# Altium PCB 扩展板.PcbDoc
Units mm, origin at the board's own origin, x right, y up, seen from the top; angles counter-clockwise.
Board outline 49.96 x 37.29 mm, 2 copper layers (Top Layer, Bottom Layer); 32 components, 23 nets, 129 pads, 60 vias.
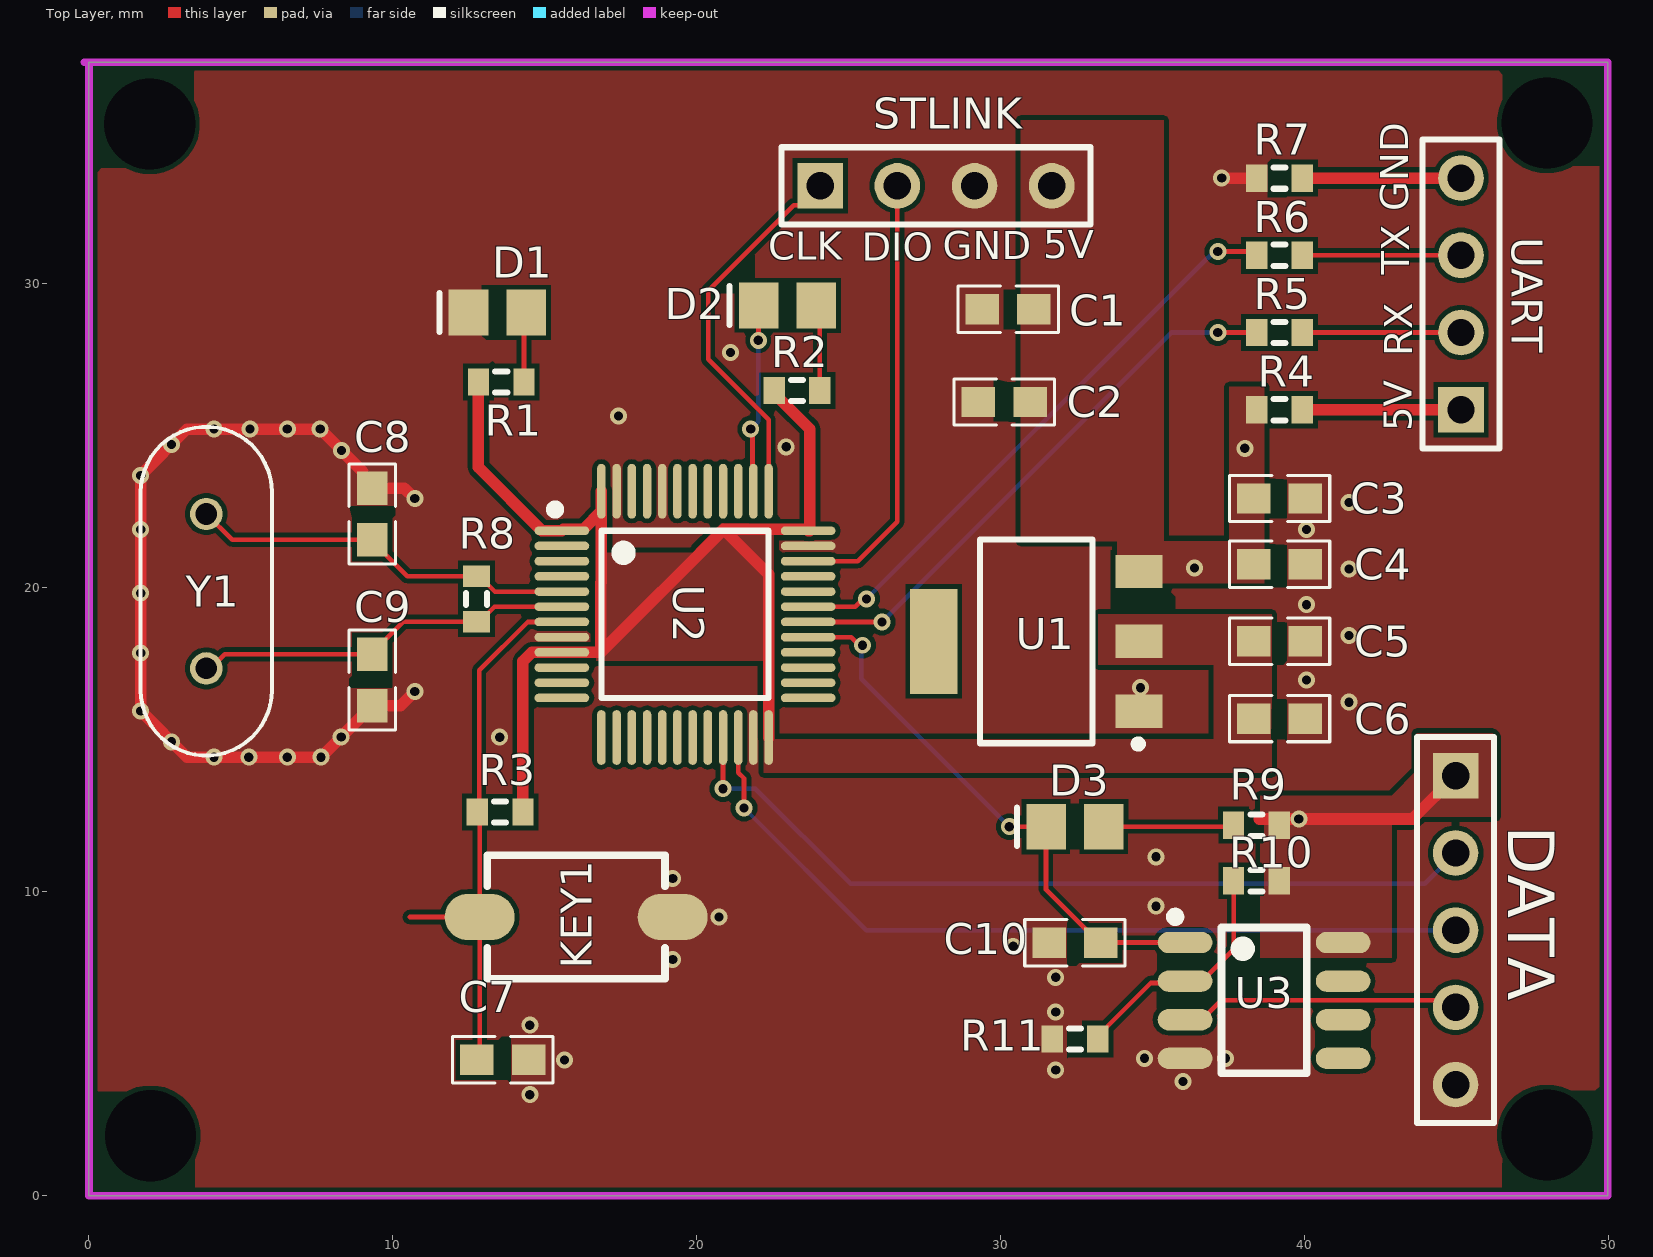
[diagram p0: Top Layer view]
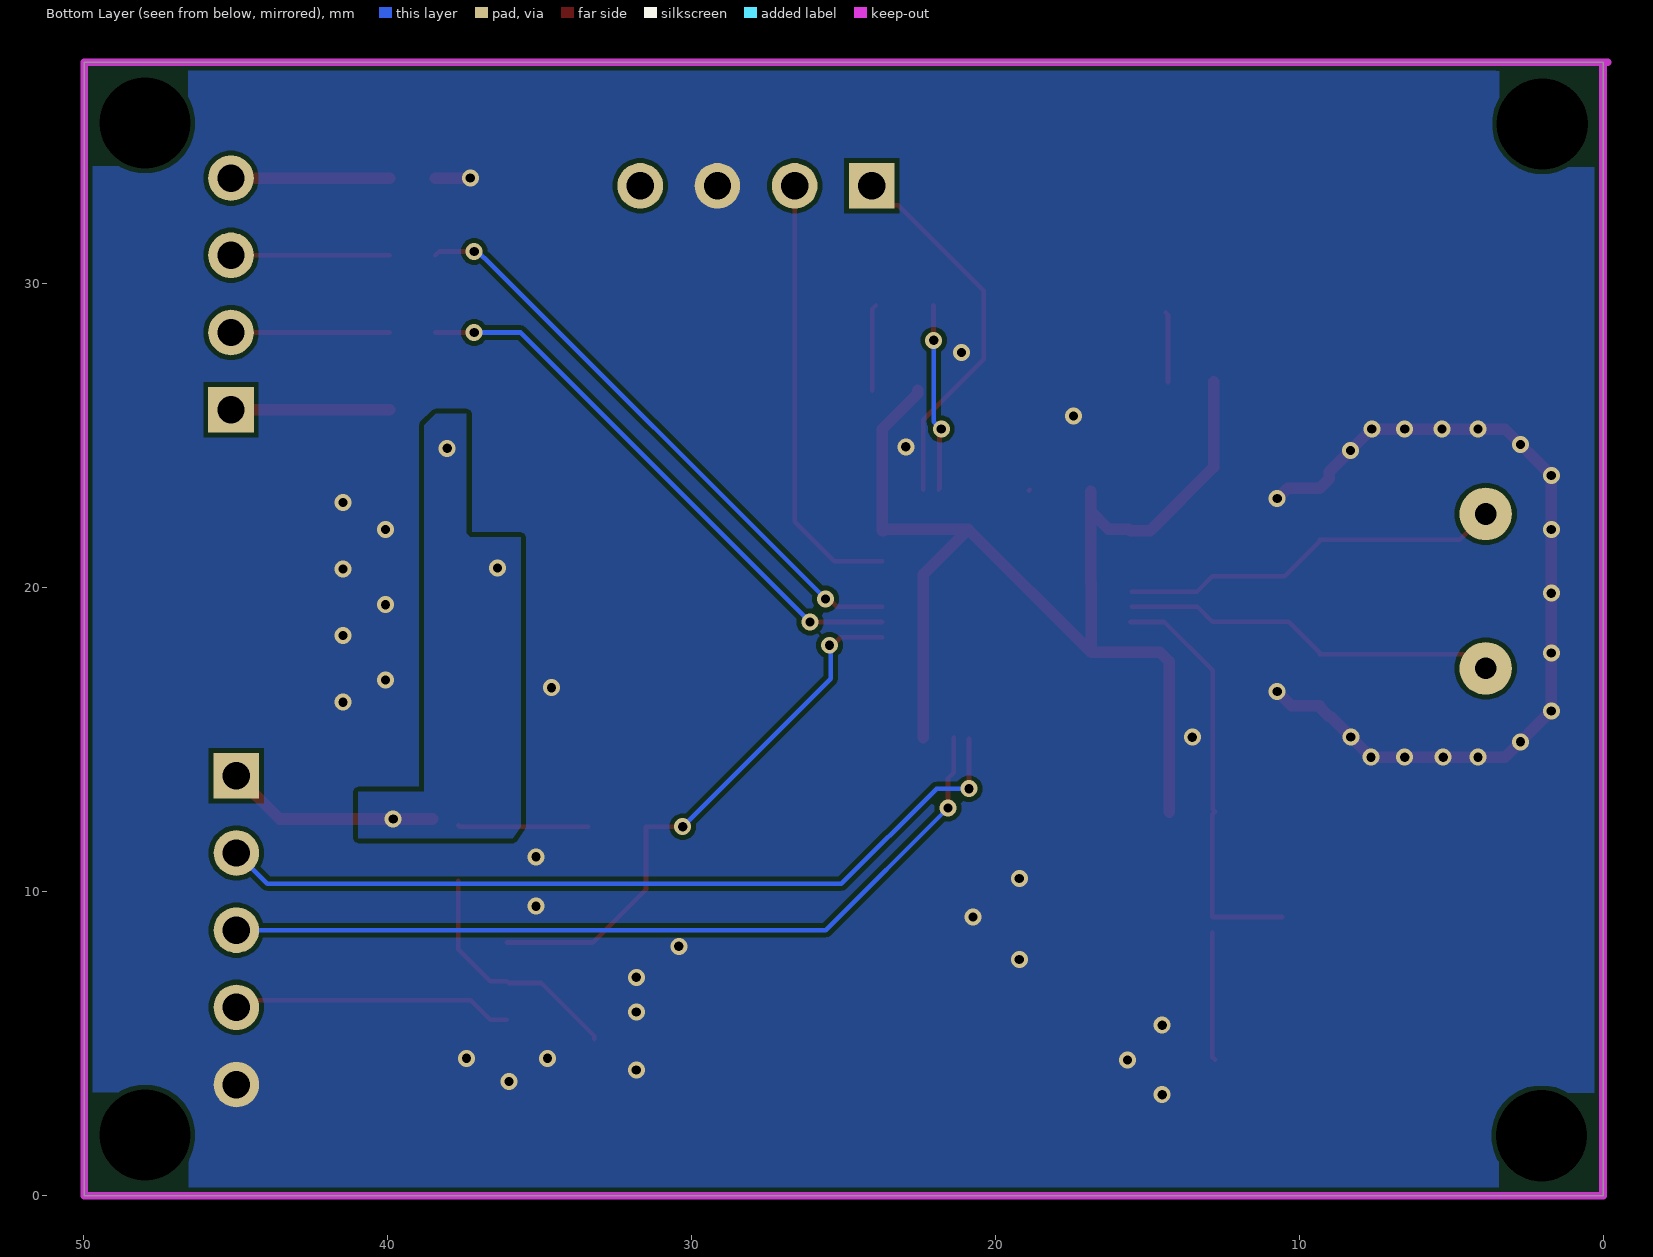
[diagram p1: Bottom Layer view, seen from below]

## Layer stack, top to bottom
Top Solder: solder mask 0.0102, Solder Resist, Dk 3.5
Top Layer: signal copper 0.0356
Dielectric 1: dielectric 0.32, FR-4, Dk 4.8
Bottom Layer: signal copper 0.0356
Bottom Solder: solder mask 0.0102, Solder Resist, Dk 3.5

## Board outline
0,0 0,37.287 49.962,37.287 49.962,0

## Design rules (kind name [scope] priority, off if disabled: settings)
Clearance [All] p1: gap=0.152 ignorepadtopadclearanceinfootprint=FALSE
PlaneClearance [All] p1: clearance=0.203
PolygonConnect PWRPlane [InNetClass('PWR')] p1: connectstyle=Direct reliefconductorwidth=0.254 reliefentries=4 polygonreliefangle="90 Angle" airgapwidth=0.254
PolygonConnect [All] p2: thpad.connectstyle=Relief thpad.reliefconductorwidth=0.254 thpad.reliefentries=4 thpad.polygonreliefangle="90 Angle" thpad.airgapwidth=0.254 smdpad.connectstyle=Relief smdpad.reliefconductorwidth=0.254 smdpad.reliefentries=4 smdpad.polygonreliefangle="90 Angle" smdpad.airgapwidth=0.254 via.connectstyle=Direct via.reliefconductorwidth=0.254 via.reliefentries=4 via.polygonreliefangle="90 Angle" via.airgapwidth=0.254
RoutingVias [All] p1: holewidth=0.305 width=0.559 viastyle="Through Hole" minholewidth=0.305 minwidth=0.559 maxholewidth=0.305 maxwidth=0.559
SilkToSilkClearance [All] p1: silktosilkclearance=0.051
SilkToSolderMaskClearance [IsPad] p1: minsilkscreentomaskgap=0.051 clearancetoexposedcopper=TRUE
SolderMaskExpansion [All] p1: expansion=0.102 istentingtop=FALSE
Width PWR [InNetClass('PWR')] p1: maxlimit=0.762 minlimit=0.305 preferedwidth=0.381
Width [All] p2: maxlimit=0.152 minlimit=0.152 preferedwidth=0.152
27 further rules are at their usual default settings.

## Classes and differential pairs
net class PWR: +5V GND NetP2_1 NetP2_4 VCC3V3
component class 扩展板: C9 C10 D1 D2 D3 KEY1 R1 R2 R3 R4 R5 R6 R7 R8 R9 R10 R11 STLINK U1 U2 U3 UART Y1

## Components (designator, comment, footprint, x,y, rotation, side; value= is the part's Value field where it differs from the comment)
C1 "106" C0603(1608) 30.238,29.159 r0 top
C2 "104" C0603(1608) 30.111,26.111 r0 top
C3 "106" C0603(1608) 39.167,22.936 r180 top
C4 "104" C0603(1608) 39.167,20.777 r180 top
C5 "106" C0603(1608) 39.167,18.237 r180 top
C6 "104" C0603(1608) 39.167,15.697 r180 top
C7 "104" C0603(1608) 13.614,4.47 r180 top
C8 "20p" C0603(1608) 9.322,22.428 r270 top
C9 "20p" C0603(1608) 9.322,16.967 r90 top
C10 "104" C0603(1608) 32.436,8.322 r180 top
D1 "LED0603" LED_0805 13.437,29.058 r180 top
D2 "LED0603" LED_0805 22.977,29.286 r180 top
D3 "LED0603" LED_0805 32.436,12.141 r180 top
DATA "Header 5" HDR1X5 44.958,13.818 r270 top (schematic designator P3)
KEY1 "KEY_M" 贴片按键 16.027,9.169 r180 top
R1 "1K" J1-0603 13.564,26.772 r180 top value=10K
R2 "1K" J1-0603 23.292,26.492 r180 top value=10K
R3 "10K" J1-0603 13.526,12.624 r0 top
R4 "0" J1-0603 39.167,25.857 r180 top value=10K
R5 "0" J1-0603 39.167,28.397 r180 top value=10K
R6 "0" J1-0603 39.167,30.937 r180 top value=10K
R7 "0" J1-0603 39.167,33.477 r180 top value=10K
R8 "1M" J1-0603 12.751,19.634 r90 top value=10K
R9 "10K" J1-0603 38.405,12.187 r0 top
R10 "1K" J1-0603 38.405,10.363 r0 top value=10K
R11 "1K" J1-0603 32.436,5.156 r0 top value=10K
STLINK "ST-LINK" HDR1X4 24.054,33.223 r0 top (schematic designator P1)
U1 "1117-3.3V" SOT-223 31.166,18.237 r90 top
U2 "STM32F103C" LQFP-48_7x7x05P 19.609,19.126 r270 top
U3 "lm393" SOP-8_150mil 38.659,6.426 r270 top
UART "USART" HDR1X4 45.136,25.857 r90 top (schematic designator P2)
Y1 "8M" XTAL-HC49US2 3.861,22.428 r270 top

## Footprints (in the part's own frame and the unit in brackets; to place one, negate y for a bottom-side part, rotate by r counter-clockwise, add the part's x,y. Pads: shape width x height; smd on the part's side, far side on the other; paste and mask are expansions set on the pad)
C0603(1608) [mm] "贴片0603"
  rect 1.1x1 smd: 1(-0.85,0) 2(0.85,0)
  silkscreen extent -1.65,-0.76 1.65,0.76, body extent -1.14,-0.38 1.14,0.38, height 1
HDR1X4 [mm] "Connector; Header; 4 Position"
  rect 1.5x1.5 hole 0.9: 1(0,0)
  round 1.5 hole 0.9: 2(2.54,0) 3(5.08,0) 4(7.62,0)
  silkscreen extent -1.27,-1.27 8.89,1.27
HDR1X5 [mm] "Connector; Header; 5 Position"
  rect 1.5x1.5 hole 0.9: 1(0,0)
  round 1.5 hole 0.9: 2(2.54,0) 3(5.08,0) 4(7.62,0) 5(10.16,0)
  silkscreen extent -1.27,-1.27 11.43,1.27
J1-0603 [mm] "Chip Resistor, Body 1.6x0.8mm, IPC High Density"
  rect 0.7x0.9 smd: 1(-0.75,0) 2(0.75,0)
  silkscreen extent -0.2,-0.35 0.2,0.35, body extent -0.85,-0.48 0.85,0.48, height 0.9
LED_0805 [mm] "贴片二极管"
  rect 1.3x1.5 smd: 1(-0.95,0) 2(0.95,0)
  silkscreen extent 1.91,-0.63 1.91,0.64
LQFP-48_7x7x05P [mm] "Thin QFP, 48-Leads, Body 7x7mm, Pitch 0.5mm, IPC Low Density"
  oval 0.28x1.8 smd mask+0.051: 1(-2.75,-4.05) 2(-2.25,-4.05) 3(-1.75,-4.05) 4(-1.25,-4.05) 5(-0.75,-4.05) 6(-0.25,-4.05) 7(0.25,-4.05) 8(0.75,-4.05) 9(1.25,-4.05) 10(1.75,-4.05) 11(2.25,-4.05) 12(2.75,-4.05) 25(2.75,4.05) 26(2.25,4.05) 27(1.75,4.05) 28(1.25,4.05) 29(0.75,4.05) 30(0.25,4.05) 31(-0.25,4.05) 32(-0.75,4.05) 33(-1.25,4.05) 34(-1.75,4.05) 35(-2.25,4.05) 36(-2.75,4.05)
  oval 1.8x0.28 smd mask+0.051: 13(4.05,-2.75) 14(4.05,-2.25) 15(4.05,-1.75) 16(4.05,-1.25) 17(4.05,-0.75) 18(4.05,-0.25) 19(4.05,0.25) 20(4.05,0.75) 21(4.05,1.25) 22(4.05,1.75) 23(4.05,2.25) 24(4.05,2.75) 37(-4.05,2.75) 38(-4.05,2.25) 39(-4.05,1.75) 40(-4.05,1.25) 41(-4.05,0.75) 42(-4.05,0.25) 43(-4.05,-0.25) 44(-4.05,-0.75) 45(-4.05,-1.25) 46(-4.05,-1.75) 47(-4.05,-2.25) 48(-4.05,-2.75)
  silkscreen extent -3.6,-4.42 2.75,2.75
SOP-8_150mil [mm]
  oval 0.7x1.8 smd: 1(-1.905,-2.6) 2(-0.635,-2.6) 3(0.635,-2.6) 4(1.905,-2.6) 5(1.905,2.6) 6(0.635,2.6) 7(-0.635,2.6) 8(-1.905,2.6)
  silkscreen extent -2.9,-3.07 2.4,1.4, body extent -2.5,-3.1 2.5,3.1, height 1.75
SOT-223 [mm]
  rect 1.1x1.55 smd: 1(-2.3,-3.375) 2(0,-3.375) 3(2.3,-3.375)
  rect 3.45x1.55 smd: 4(0,3.375)
  silkscreen extent -3.5,-3.48 3.35,1.85, body extent -3.3,-3.94 3.3,3.43, height 0.8
XTAL-HC49US2 [mil]
  round 42 / inner round 68 / far side round 68 hole 28: 1(0,0) 2(200,0)
  silkscreen extent -113,-85 313,85
贴片按键 [mm]
  oval 2.3x1.524 smd: 1(-3.175,0) 2(3.175,0)
  silkscreen extent -2.92,-2.03 2.92,2.03

## Part data
C1 C2 C3 C4 C5 C6 C7 C8 C9 C10: library part C_无极性_0603
D1 D2 D3: "发光二极管", LatestRevisionDate=08-Jul-2005, LatestRevisionNote="Mech Layer 1 removed.", PackageReference=LED-0, Published=8-Jun-2000, Publisher="Altium Limited"
DATA: "Header, 5-Pin", LatestRevisionDate=17-Jul-2002, LatestRevisionNote="Re-released for DXP Platform.", Publisher="Altium Limited"
R1 R2 R3 R4 R5 R6 R7 R8 R9 R10 R11: library part Res3, "Resistor", LatestRevisionDate=29-May-2009, LatestRevisionNote="IPC-7351 Footprint Added.", PackageDescription="Chip Resistor", PackageReference=J1-0603, Published=8-Jun-2000, Publisher="Altium Limited"
STLINK UART: library part "Header 4", "Header, 4-Pin", LatestRevisionDate=17-Jul-2002, LatestRevisionNote="Re-released for DXP Platform.", Publisher="Altium Limited"
U1: "xA 3.3V", ComponentLink1Description="Manufacturer Link", ComponentLink1URL=http://www.national.com/, ComponentLink2Description=Datasheet, ComponentLink2URL=http://www.national.com/ds.cgi/LM/LM2940.pdf, ComponentLink3Description="URL Link1", ComponentLink3URL=http://www.national.com/pf/LM/LM2940C.html, DatasheetVersion=Jun-1999, Note="Tab is connected to GND", PackageDescription="TO, Thru-Hole, Vertical, Heatsink Mounted; 3 In-Line Leads; Pitch 2.54 mm", PackageReference=T03B, PackageVersion=1995, Published=15-Apr-2002, Publisher="Altium Limited"
U2: "STM32单片机48引脚"
Y1: library part XTAL, "Crystal Oscillator", LatestRevisionDate=17-Jul-2002, LatestRevisionNote="Re-released for DXP Platform.", PackageDescription="Crystal, Thru-Hole; 2 Leads; Body 3.1 x 8.2 mm (Dia.xH)", PackageReference=R38, Published=8-Jun-2000, Publisher="Altium Limited"

## Free pads (board coordinates)
  round 1.524 hole 3: 1(2,35.262) 1(2.025,1.975) 1(47.962,35.287) 1(47.962,2)

## Via types
v1: diameter 0.559, hole 0.305, Top Layer to Bottom Layer, tented both sides, 60 vias

## Nets (pads, with @x,y where several pads share a name; then routed paths per layer and width w, separated by ;. In a path a pad name is that pad's centre, name@x,y a point inside that pad or via, vN(x,y) a via of type N, cw(c..) or ccw(c..) an arc to the next point about the centre after c; other vN are vias at no path point)
3144E3: C10.1 D3.2 U2.29 U3.1 | length 18.4
  Top Layer w0.152: U2.29@23.709,18.376 25.075,18.376 25.341,18.11 v1(25.451,18.11) ; v1(30.277,12.141) D3.2 31.486,10.072 33.236,8.322 C10.1 33.295,8.331 U3.1
  Bottom Layer w0.152: v1(25.451,18.11) 25.403,18.062 25.403,17.015 v1(30.277,12.141)
+5V: C1.2 C2.2 C3.2 C4.2 DATA.1 R4.2 R9.2 R10.2 STLINK.4 U1.3 U3.8 | length 7
  Top Layer w0.381: 38.506,12.395 43.536,12.395 DATA.1
  other v1: 39.802,12.395 36.373,20.65 38.024,24.587
GND: C1.1 C2.1 C3.1 C4.1 C5.1 C6.1 C7.1 C8.1 C9.1 C10.2 D1.2 DATA.5 KEY1.1 R7.2 R11.1 STLINK.3 U1.1 U2.8 U2.23 U2.35 U2.44 U2.47 U3.4 | length 30.2
  Top Layer w0.152: U2.44@18.859,23.226 U2.44@18.883,23.202
  Top Layer w0.381: v1(10.719,16.586) 10.25,16.117 C9.1 9.322,16.067 9.012,15.758 8.962,15.758 v1(7.632,14.427) 3.226,14.427 v1(1.702,15.951) v1(1.702,23.698) 3.226,25.222 v1(4.115,25.222) v1(7.606,25.222) 9.012,23.816 9.012,23.588 C8.1 10.377,23.278 v1(10.719,22.936) ; v1(37.262,33.477) R7.2
  other v1: 14.503,3.327 35.992,3.759 31.801,4.14 15.646,4.47 34.722,4.521 37.389,4.521 14.503,5.613 31.801,6.045 31.801,7.188 19.202,7.772 30.404,8.204 20.726,9.169 35.103,9.525 19.202,10.439 35.103,11.151 4.115,14.427 5.258,14.427 6.528,14.427 2.718,14.935 8.297,15.092 13.513,15.088 41.453,16.237 34.595,16.713 40.056,16.967 1.702,17.856 41.453,18.428 40.056,19.444 1.702,19.825 41.453,20.618 1.702,21.92 40.056,21.92 41.453,22.809 8.309,24.519 22.936,24.638 2.718,24.714 5.302,25.222 6.528,25.222 17.424,25.654 21.107,27.737
LED: D2.2 U2.38 | length 6.2
  Top Layer w0.152: v1(21.768,25.222) 21.831,25.159 21.831,23.254 U2.38@21.859,23.226 ; v1(22.022,28.143) 22.027,28.148 D2.2
  Bottom Layer w0.152: v1(21.768,25.222) 21.785,25.222 22.022,25.459 v1(22.022,28.143)
NetC8_2: C8.2 R8.2 U2.5 Y1.1 | length 12.7
  Top Layer w0.152: Y1.1 4.711,21.578 C8.2 9.322,21.528 10.466,20.384 R8.2 12.851,20.384 13.359,19.876 U2.5@15.509,19.876
NetC9_2: C9.2 R8.1 U2.6 Y1.2 | length 12.5
  Top Layer w0.152: Y1.2 4,17.348 4.469,17.817 C9.2 9.322,17.867 10.339,18.884 R8.1 12.851,18.884 13.343,19.376 U2.6@15.509,19.376
NetD1_1: D1.1 R1.1 | length 2.3
  Top Layer w0.152: R1.1 14.314,28.985 D1.1
NetD2_1: D2.1 R2.1 | length 2.8
  Top Layer w0.152: D2.1 24.042,29.171 R2.1
NetD3_1: D3.1 R9.1 | length 4.3
  Top Layer w0.152: D3.1 37.609,12.141 R9.1
NetP2_1: R4.1 UART.1 | length 5.2
  Top Layer w0.381: R4.1 UART.1
NetP2_2: R5.1 UART.2 | length 5.2
  Top Layer w0.152: R5.1 UART.2
NetP2_3: R6.1 UART.3 | length 5.2
  Top Layer w0.152: R6.1 UART.3
NetP2_4: R7.1 UART.4 | length 5.2
  Top Layer w0.381: R7.1 UART.4
NetR10_1: R10.1 R11.2 U3.2 | length 8
  Top Layer w0.152: R11.2 33.186,5.256 34.93,7.001 35.998,7.001 U3.2 36.609,7.061 37.655,8.107 R10.1
NRST: C7.2 KEY1.2 R3.1 U2.7 | length 18.1
  Top Layer w0.152: 10.554,9.169 KEY1.2 12.852,12.548 R3.1 12.764,12.636 12.84,12.712 12.84,17.285 14.431,18.876 U2.7 ; C7.2 12.852,4.558 KEY1.2@12.852,8.661
OUT: DATA.4 U3.3 | length 9.3
  Top Layer w0.152: U3.3 36.609,5.791 37.244,6.426 44.729,6.426 DATA.4
RC: DATA.2 U2.21 | length 27.5
  Top Layer w0.152: v1(20.859,13.391) U2.21@20.859,15.026
  Bottom Layer w0.152: v1(20.859,13.391) 21.926,13.391 25.055,10.262 43.942,10.262 DATA.2
RXD: R5.2 U2.30 | length 18.7
  Top Layer w0.152: U2.30@23.709,18.876 26.082,18.876 v1(26.086,18.872) ; v1(37.135,28.397) R5.2
  Bottom Layer w0.152: v1(26.086,18.872) 35.611,28.397 v1(37.135,28.397)
SWCLK: STLINK.1 U2.37 | length 12.5
  Top Layer w0.152: U2.37@22.359,23.226 22.359,25.533 20.371,27.521 20.371,29.769 23.18,32.578 23.409,32.578 STLINK.1
SWDIO: STLINK.2 U2.34 | length 14.5
  Top Layer w0.152: U2.34@23.709,20.876 25.296,20.876 26.594,22.174 STLINK.2
TD: DATA.3 U2.22 | length 27.4
  Top Layer w0.152: U2.22 21.359,13.922 21.549,13.731 v1(21.549,12.756)
  Bottom Layer w0.152: v1(21.549,12.756) 25.568,8.738 ; 25.603,8.738 DATA.3
TXD: R6.2 U2.31 | length 19.6
  Top Layer w0.152: U2.31@23.709,19.376 25.21,19.376 25.468,19.634 v1(25.578,19.634) ; v1(37.135,31.064) 38.29,31.064 R6.2
  Bottom Layer w0.152: v1(25.578,19.634) 36.803,30.859 36.82,30.859 37.025,31.064 v1(37.135,31.064)
VCC3V3: C5.2 C6.2 R1.2 R2.2 R3.2 U1.2 U2.1 U2.9 U2.24 U2.36 U2.48 | length 42
  Top Layer w0.381: R1.2 12.814,23.962 14.9,21.876 U2.1 15.609,21.927 16.268,21.927 U2.48@16.859,22.517 ; R3.2 14.276,17.578 14.574,17.876 U2.9 16.835,17.876 ; U2.48 U2.48@16.859,22.517 ; U2.24 22.359,20.44 20.879,21.92 ; R2.2 22.542,26.392 23.709,25.225 U2.36@23.709,21.876 ; U2.36 23.615,21.92 20.879,21.92 ; 16.835,17.876 16.835,20.159 16.859,20.183 U2.48@16.859,22.517 ; 16.835,17.876 20.879,21.92
pads on no net: U1.4 U2.2 U2.3 U2.4 U2.10 U2.11 U2.12 U2.13 U2.14 U2.15 U2.16 U2.17 U2.18 U2.19 U2.20 U2.25 U2.26 U2.27 U2.28 U2.32 U2.33 U2.39 U2.40 U2.41 U2.42 U2.43 U2.45 U2.46 U3.5 U3.6 U3.7

## Polygon pours and split planes (outlines as drawn)
GND on Top Layer "NONET_L-01_P-001" (solid, remove dead copper, pour order 34): -5.029,42.443 -5.029,-3.531 -4.877,-3.683 -4.394,-3.2 54.889,-3.2 54.889,42.266 55.067,42.443
+5V on Top Layer "NONET_L-01_P-001" (solid, remove dead copper, pour order 33): 42.85,12.471 43.815,12.471 46.279,12.471 46.279,15.113 46.177,15.215 43.688,15.215 43.688,13.995 42.85,13.157
VCC3V3 on Top Layer "VCC3V3_L01_P029" (solid, remove dead copper, pour order 29): 22.504,22.098 22.53,22.073 22.53,21.158 19.837,21.158 20.803,22.123
VCC3V3 on Top Layer "VCC3V3_L01_P028" (solid, remove dead copper, pour order 28): 16.688,21.412 16.688,17.602 22.276,17.602 22.53,17.856 22.53,21.158 17.577,21.158 16.942,21.158
VCC3V3 on Top Layer "VCC3V3_L01_P016" (solid, remove dead copper, pour order 16): 38.913,13.919 22.2,13.919 22.2,15.026 38.877,15.026 38.913,15.062
GND on Top Layer "GND_L01_P017" (solid, pour order 17): 39.294,24.333 41.961,24.333 41.961,13.919 41.834,14.046 39.421,14.046
+5V on Top Layer "+5V_L01_P018" (solid, pour order 18): 35.357,21.539 35.357,35.382 30.658,35.382 30.658,21.539
+5V on Top Layer "+5V_L01_P015" (solid, pour order 15): 38.659,26.619 38.659,20.142 33.833,20.142 33.833,21.539 37.516,21.539 37.516,26.619
VCC3V3 on Top Layer "VCC3V3_L01_P001" (solid, remove dead copper, pour order 1): 38.913,19.126 38.913,14.681 37.008,14.681 37.008,17.475 33.198,17.475 33.198,19.126
+5V on Top Layer "+5V_L01_P004" (solid, remove dead copper, pour order 4): 38.532,13.157 38.532,7.823 42.85,7.823 42.85,13.157
GND on Bottom Layer "NONET_L-01_P-001" (solid, remove dead copper, pour order 32): -5.029,42.443 -5.029,-3.531 -4.877,-3.683 -4.394,-3.2 54.889,-3.2 54.889,42.266 55.067,42.443
+5V on Bottom Layer "+5V_L02_P023" (solid, pour order 23): 37.389,25.73 37.389,21.793 37.262,21.666 35.611,21.666 35.611,12.268 35.611,12.141 35.865,11.76 40.945,11.76 40.945,13.284 38.786,13.284 38.786,25.349 38.405,25.73

## Keep-outs
Keep-Out Layer:
  lines w0.254: -0.152,37.287 49.962,37.287 ; 49.962,0.076 49.962,37.287 ; 49.962,37.287 49.962,0 0,0 0,37.287 49.962,37.287

## Other copper
Top Layer:
  pour cut-out: 3.454,0.229 3.49,0.264 3.49,1.192 3.314,1.192 2.507,0.386 2.524,0.369 2.524,0.259
  pour cut-out: 0.279,3.404 0.315,3.439 1.243,3.439 1.243,3.263 0.437,2.457 0.42,2.473 0.31,2.473
  pour cut-out: 46.516,0.128 46.481,0.163 46.481,1.091 46.657,1.091 47.463,0.285 47.447,0.268 47.447,0.159
  pour cut-out: 49.708,3.429 49.672,3.464 48.745,3.464 48.745,3.288 49.551,2.482 49.567,2.498 49.677,2.498
  pour cut-out: 49.708,3.429 49.672,3.464 48.745,3.464 48.745,3.288 49.551,2.482 49.567,2.498 49.677,2.498
  pour cut-out: 46.533,0.254 46.497,0.289 46.497,1.217 46.674,1.217 47.48,0.411 47.463,0.395 47.463,0.285
  pour cut-out: 0.254,33.833 0.289,33.797 1.217,33.797 1.217,33.974 0.411,34.78 0.395,34.763 0.285,34.763
  pour cut-out: 3.429,37.008 3.464,36.972 3.464,36.045 3.288,36.045 2.482,36.851 2.498,36.867 2.498,36.977
  pour cut-out: 0.254,33.833 0.289,33.797 1.217,33.797 1.217,33.974 0.411,34.78 0.395,34.763 0.285,34.763
  pour cut-out: 3.429,37.008 3.464,36.972 3.464,36.045 3.288,36.045 2.482,36.851 2.498,36.867 2.498,36.977
  pour cut-out: 46.533,37.033 46.497,36.998 46.497,36.07 46.674,36.07 47.48,36.876 47.463,36.892 47.463,37.002
  pour cut-out: 49.723,33.901 49.688,33.866 48.76,33.866 48.76,34.042 49.566,34.848 49.583,34.832 49.692,34.832
  pour cut-out: 49.723,33.901 49.688,33.866 48.76,33.866 48.76,34.042 49.566,34.848 49.583,34.832 49.692,34.832
  pour cut-out: 46.533,37.033 46.497,36.998 46.497,36.07 46.674,36.07 47.48,36.876 47.463,36.892 47.463,37.002
  pour cut-out: 13.271,27.445 13.341,27.374 13.811,27.374 13.811,27.295 13.796,27.28 13.449,27.28 13.449,27.284 13.301,27.432
  pour cut-out: 20.604,29.673 20.609,29.667 21.895,29.667 21.895,30.937
  pour cut-out: 33.613,19.835 33.613,19.288 33.579,19.253 35.738,19.253 35.738,19.708 35.468,19.977
  pour cut-out: 42.171,5.429 42.171,4.883 40.347,4.883 40.347,5.429
  pour cut-out: 35.133,6.719 35.133,6.167 35.147,6.153 35.263,6.27 36.776,6.27 36.776,6.504 36.971,6.699
  pour cut-out: 35.147,7.969 35.147,7.423 36.641,7.423 36.971,7.753 36.971,7.969
  pour cut-out: 13.691,27.28 13.437,27.28 13.31,27.153 13.31,26.264 13.691,26.264
  pour cut-out: 13.584,29.96 13.584,28.155 13.069,28.155 12.929,28.296 12.929,29.947
  pour cut-out: 13.774,12.021 13.279,12.021 13.279,13.226 13.774,13.226
  pour cut-out: 9.974,17.115 8.669,17.115 8.56,17.005 8.56,16.713 9.957,16.713 9.974,16.731
  pour cut-out: 13.199,19.882 12.148,19.882 12.148,19.387 13.199,19.387
  pour cut-out: 9.974,17.115 9.974,16.731 9.957,16.713 8.56,16.713 8.56,17.005 8.669,17.115
  pour cut-out: 8.56,22.682 10.084,22.682 10.084,22.39 9.974,22.281 8.669,22.281
  pour cut-out: 23.539,27.095 23.539,26.069 23.224,26.384 23.044,26.384 23.044,27.095
  pour cut-out: 23.124,30.189 23.124,28.384 22.829,28.384 22.829,30.189
  pour cut-out: 30.258,26.764 30.258,25.459 30.241,25.476 29.769,25.476 29.769,26.873
  pour cut-out: 30.493,29.812 30.493,28.507 30.09,28.507 30.09,29.812
  pour cut-out: 39.414,34.08 39.414,32.875 39.382,32.842 38.786,32.842 38.786,33.985 38.913,34.112
  pour cut-out: 39.414,31.54 39.414,30.335 38.919,30.335 38.919,31.54
  pour cut-out: 39.414,29 39.414,27.795 38.919,27.795 38.919,29
  pour cut-out: 39.414,26.46 39.414,25.255 38.919,25.255 38.919,26.46
  pour cut-out: 39.421,23.571 39.421,22.301 39.403,22.284 39.019,22.284 39.019,23.589
  pour cut-out: 39.421,20.015 39.41,20.026 38.775,20.026 38.775,21.186 39.019,21.43 39.037,21.412 39.421,21.412
  pour cut-out: 39.421,18.872 39.421,17.602 39.294,17.475 38.913,17.475 38.913,18.872
  pour cut-out: 38.913,16.332 39.421,16.332 39.421,14.935 39.33,15.026 38.877,15.026
  pour cut-out: 38.157,10.966 38.564,10.966 38.659,10.871 38.659,9.855 38.252,9.855 38.157,9.761
  pour cut-out: 38.151,12.522 38.659,12.522 38.659,11.633 38.61,11.585 38.157,11.585
  pour cut-out: 32.69,5.537 32.683,5.531 32.683,4.554 32.214,4.554 32.182,4.521 32.182,5.537
  pour cut-out: 32.583,8.975 32.19,8.975 32.182,8.966 32.182,7.569 32.483,7.569 32.583,7.67
  pour cut-out: 32.182,12.903 32.69,12.903 32.69,11.333 32.643,11.379 32.182,11.379
  pour cut-out: 13.774,12.021 13.279,12.021 13.279,13.226 13.774,13.226
  pour cut-out: 13.467,3.818 13.759,3.818 13.868,3.708 13.868,5.232 13.576,5.232 13.467,5.123
Bottom Layer:
  pour cut-out: 3.438,0.245 3.438,1.173 3.018,0.753 2.803,0.753 2.803,0.714 2.491,0.402 2.507,0.386 2.507,0.276
  pour cut-out: 0.296,3.387 1.224,3.387 0.804,2.967 0.804,2.752 0.765,2.752 0.453,2.44 0.437,2.457 0.327,2.457
  pour cut-out: 49.691,3.413 48.763,3.413 49.183,2.993 49.183,2.778 49.222,2.778 49.534,2.466 49.551,2.482 49.661,2.482
  pour cut-out: 46.533,0.144 46.533,1.072 46.953,0.652 47.168,0.652 47.168,0.613 47.48,0.301 47.463,0.285 47.463,0.175
  pour cut-out: 0.254,33.833 1.182,33.833 0.762,34.253 0.762,34.468 0.723,34.468 0.411,34.78 0.395,34.763 0.285,34.763
  pour cut-out: 3.413,36.991 3.413,36.063 2.993,36.483 2.778,36.483 2.778,36.522 2.466,36.834 2.482,36.851 2.482,36.961
  pour cut-out: 46.549,37.017 46.549,36.089 46.969,36.509 47.184,36.509 47.184,36.548 47.496,36.86 47.48,36.876 47.48,36.986
  pour cut-out: 49.691,33.875 48.763,33.875 49.183,34.295 49.183,34.51 49.222,34.51 49.534,34.822 49.551,34.805 49.661,34.805

## Silkscreen, mask and mechanical layers (free items; w line width, h text height)
Top Overlay:
  text "GND" at 43.409,32.385 h0.92 r90
  text "5V" at 31.394,30.836 h0.92
  text "GND" at 28.092,30.81 h0.92
  text "CLK" at 22.352,30.785 h0.92
  text "DIO" at 25.425,30.759 h0.92
  text "TX" at 43.434,30.302 h0.92 r90
  text "RX" at 43.536,27.61 h0.92 r90
  text "5V" at 43.51,25.146 h0.92 r90
Mechanical 1:
  the board outline again, w0.254